# EAGLE board port checker12 (EAGLE 9.1.0)

Size 100 x 80 mm. Coordinates in mm from the lower left corner, seen from the top.
Outline: 0,0 100,0 100,80 0,80 0,0
Copper layers (1*16): Top 0.035mm / dielectric 1.5mm / Bottom 0.035mm
Design rules "default": minimum track width 6mil, minimum drill 0.35mm, track to track 6mil, track to pad 6mil, pad to pad 6mil, via to via 6mil, smd to smd 6mil, copper to edge 40mil, drill to drill 6mil, minimum pad ring 10mil, minimum via ring 8mil, stop-mask expansion 4mil, vias tented up to drill 0mil, thermal gap 10mil

## Footprints (pad centres in the part's own frame; a part is rotated, then mirrored left to right if it is on the bottom)
2X05 = drill 1.016 octagon: 1 -5.08,-1.27; 2 -5.08,1.27; 3 -2.54,-1.27; 4 -2.54,1.27; 5 0,-1.27; 6 0,1.27; 7 2.54,-1.27; 8 2.54,1.27; 9 5.08,-1.27; 10 5.08,1.27
LED3MM = drill 0.813 octagon: A -1.27,0; K 1.27,0
0207/10 = drill 0.813 octagon: 1 -5.08,0; 2 5.08,0

## Placement (x,y rotation side)
JP1  [2X05]  44.68,30.81 90 top
LED1  [LED3MM]  73.98,33.67 0 top
LED2  [LED3MM]  73.68,26.75 0 top
LED3  [LED3MM]  73.52,39.75 0 top
LED4  [LED3MM]  17.36,19.75 0 top
LED5  [LED3MM]  74.68,18.83 0 top
LED6  [LED3MM]  16.52,26.83 0 top
LED7  [LED3MM]  16.36,40.83 0 top
LED8  [LED3MM]  16.68,33.91 0 top
R1  [0207/10]  58.98,34.27 0 top
R2  [0207/10]  58.95,26.16 0 top
R3  [0207/10]  59.25,39.16 0 top
R4  [0207/10]  29.95,19.24 180 top
R5  [0207/10]  60.25,18.24 180 top
R6  [0207/10]  29.95,26.32 0 top
R7  [0207/10]  30.25,40.32 0 top
R8  [0207/10]  29.95,34.4 0 top

## Library data of the parts
JP1 = pinhead
LED1-LED8 = led
R1-R8 = resistor

## Nets
GND: JP1.10 LED1.K LED2.K LED3.K LED4.K LED5.K LED6.K LED7.K LED8.K
N$1: JP1.1 R5.2
N$2: JP1.3 R6.2
N$3: JP1.5 R7.2
N$4: JP1.7 R8.2
N$5: JP1.2 R1.1
N$6: JP1.4 R2.1
N$7: JP1.6 R3.1
N$8: JP1.8 R4.1
N$9: LED5.A R5.1
N$10: LED6.A R6.1
N$11: LED7.A R7.1
N$12: LED8.A R8.1
N$13: LED1.A R1.2
N$14: LED2.A R2.2
N$15: LED3.A R3.2
N$16: LED4.A R4.2

## Tracks (layer width: path | path; a pad name or v marks a point on that pad's centre or on a via)
GND  (8 unrouted)
N$1  (1 unrouted)
N$2  (1 unrouted)
N$3  (1 unrouted)
N$4  (1 unrouted)
N$5  (1 unrouted)
N$6  (1 unrouted)
N$7  (1 unrouted)
N$8  (1 unrouted)
N$9  (1 unrouted)
N$10  (1 unrouted)
N$11  (1 unrouted)
N$12  (1 unrouted)
N$13  (1 unrouted)
N$14  (1 unrouted)
N$15  (1 unrouted)
N$16  (1 unrouted)